# Altium PCB PCB.PcbDoc
Units mil, origin at the board's own origin, x right, y up, seen from the top; angles counter-clockwise.
Board outline 1745 x 3885 mil, 4 copper layers (Top Layer, GND, 3V3, Bottom Layer), stack 23.756 mil thick; 45 components, 36 nets, 184 pads, 198 vias.
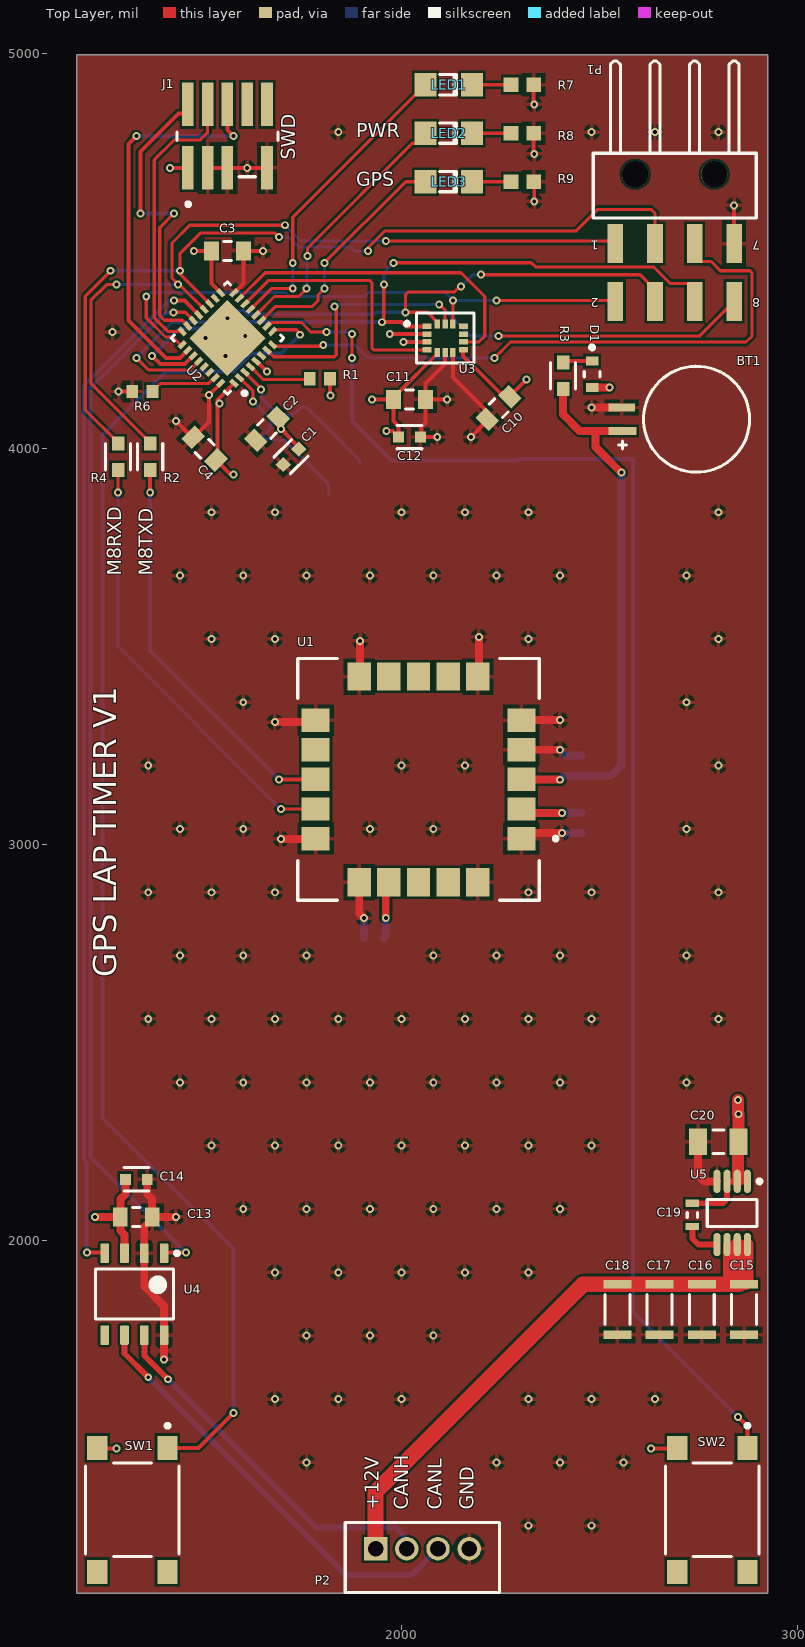
[diagram p0: Top Layer view]
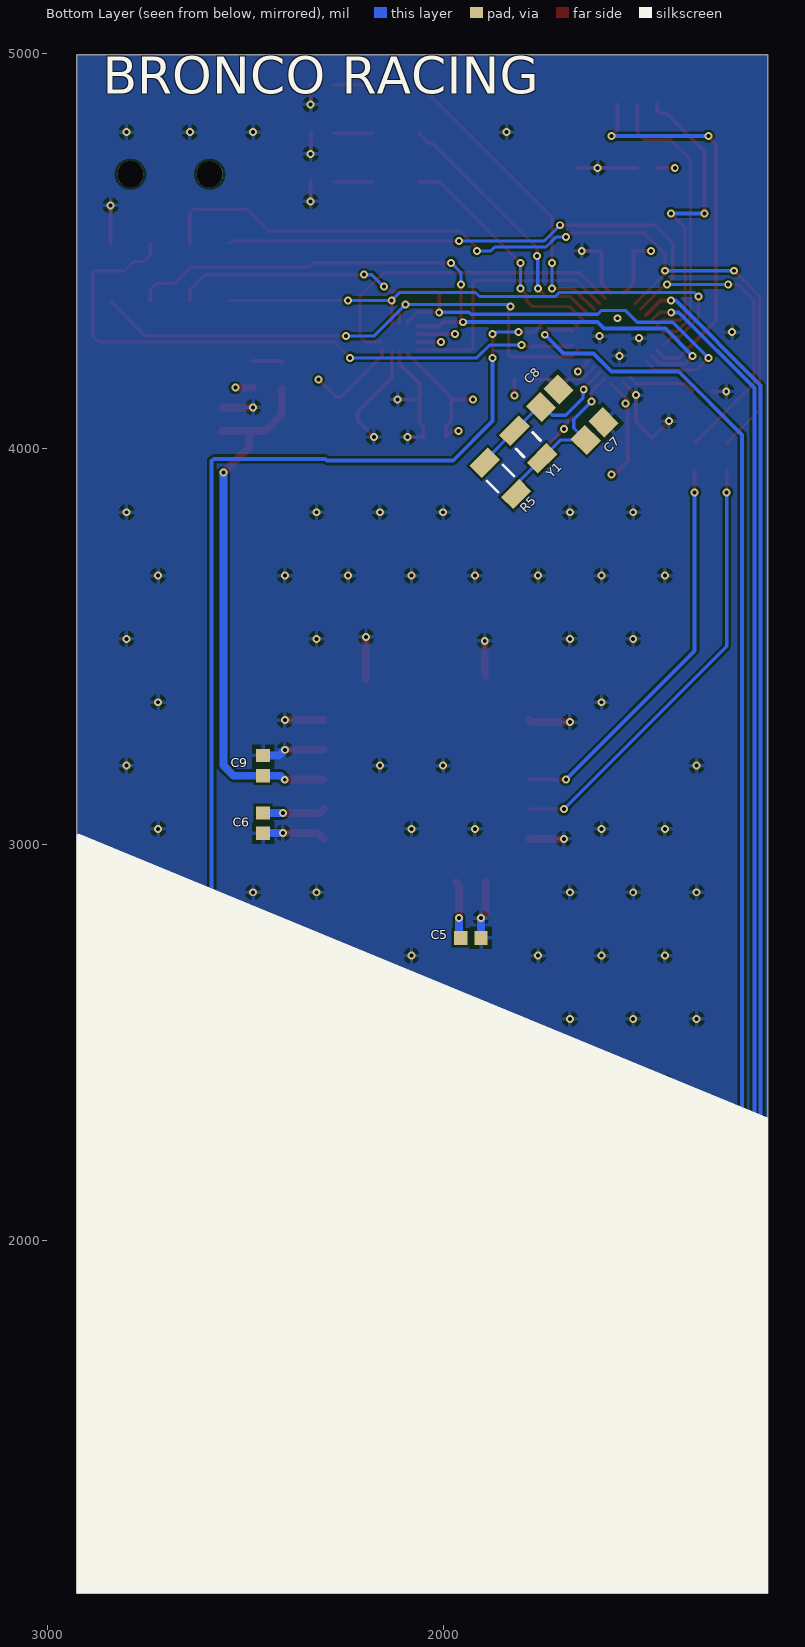
[diagram p1: Bottom Layer view, seen from below]
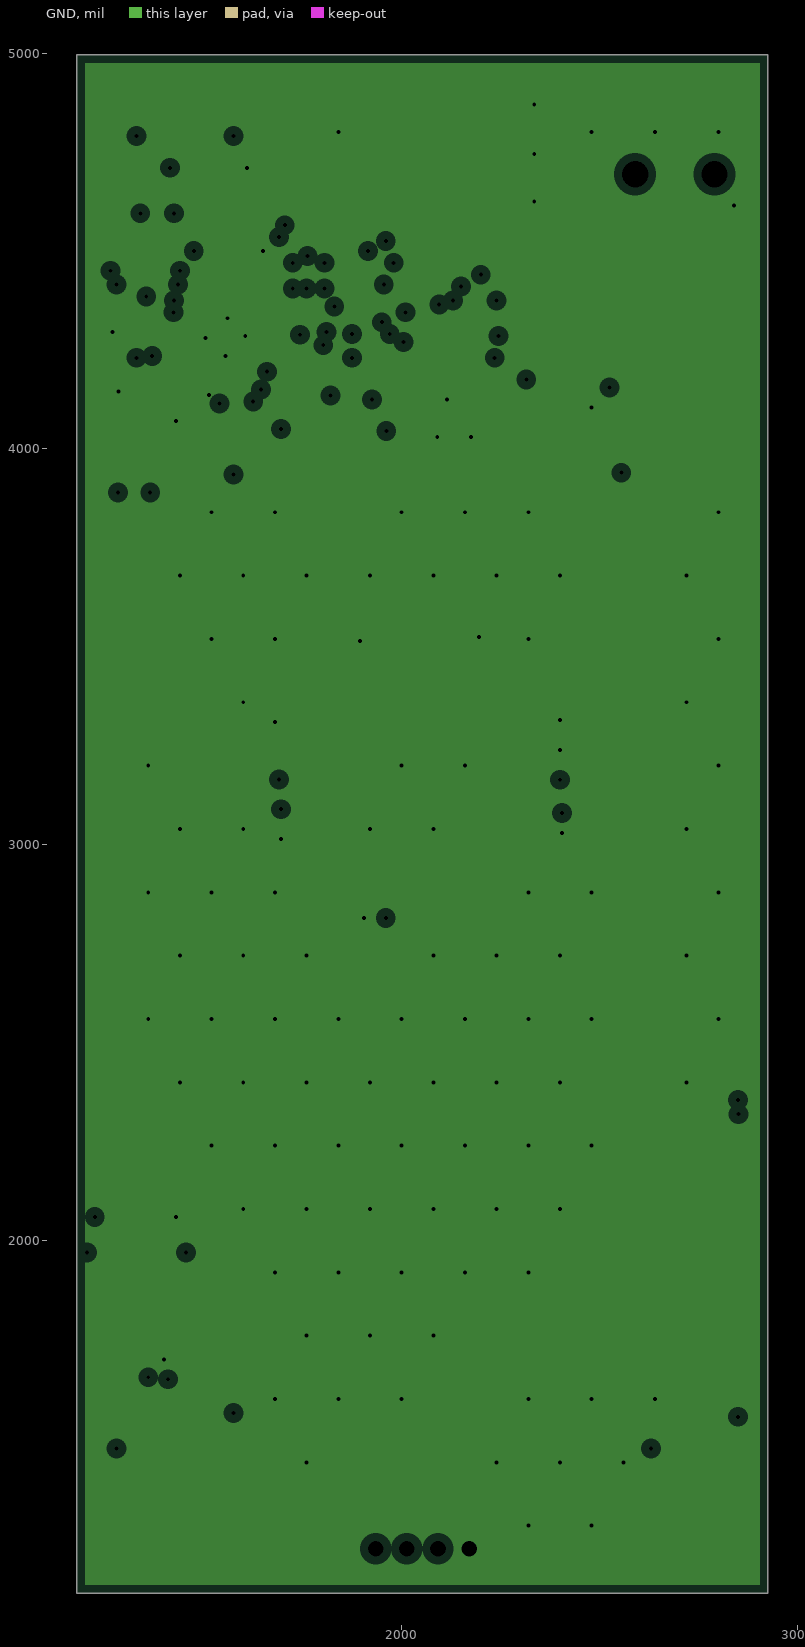
[diagram p2: GND, clearances drawn from the general rule]
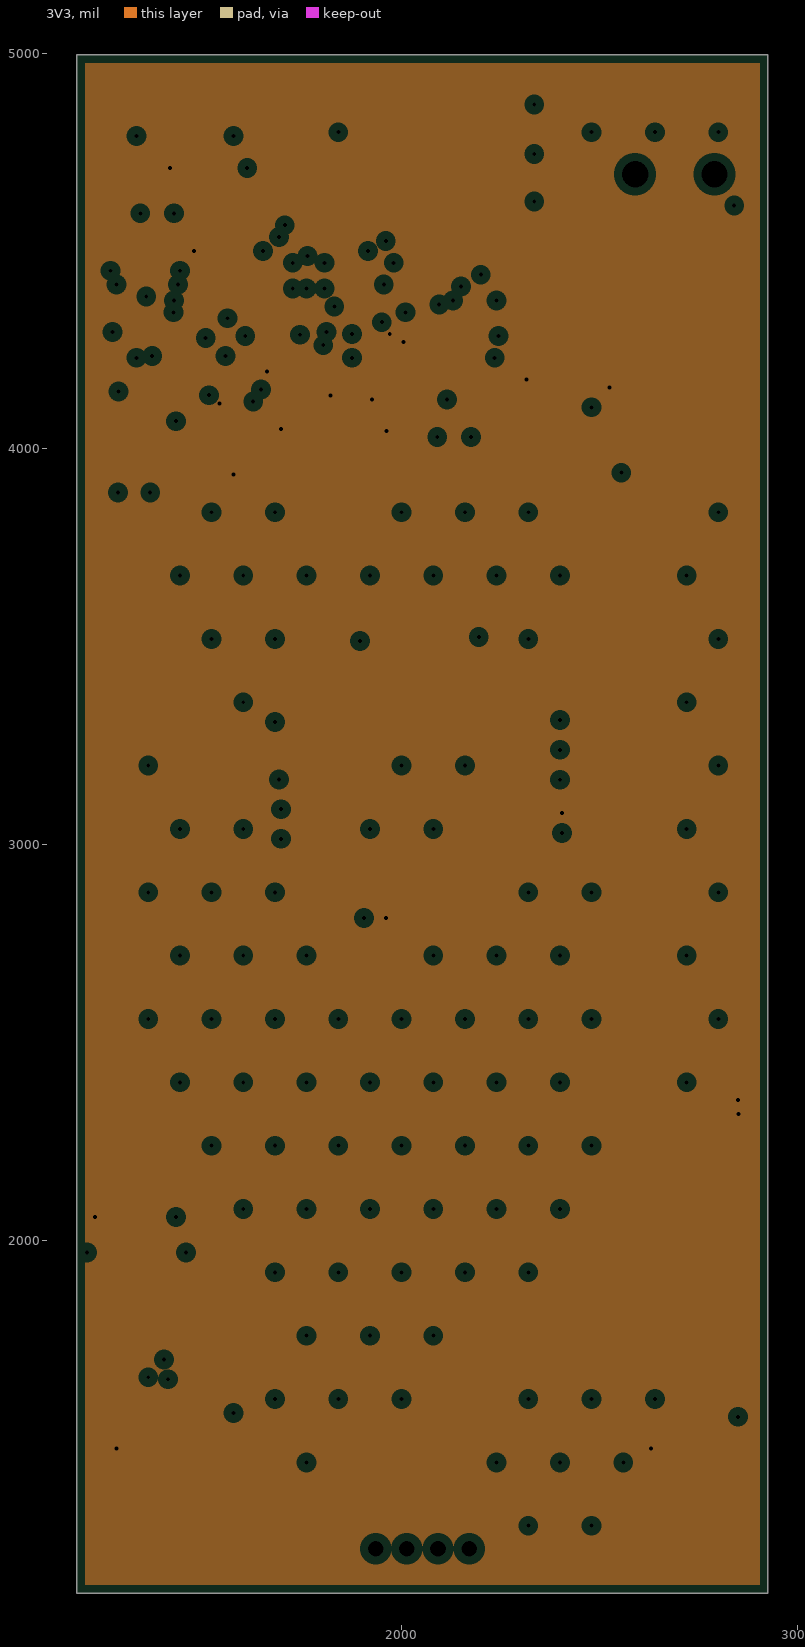
[diagram p3: 3V3, clearances drawn from the general rule]
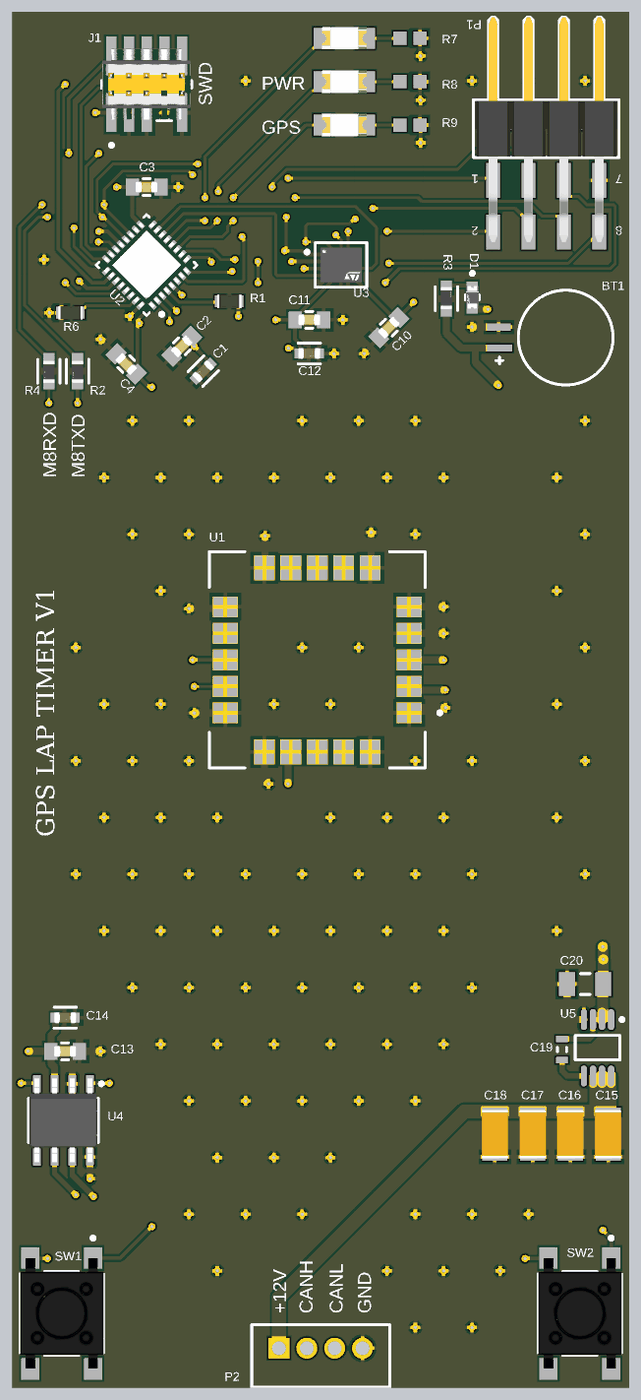
[diagram p4: 3D render of the assembled board from above, using the file's embedded part models]

## Layer stack, top to bottom
Top Solder: solder mask 0.4, Solder Resist, Dk 3.5
Top Layer: signal copper 1.4
Dielectric 2: prepreg 2.8, PP-006, Dk 4.1
GND: plane copper 1.378, net GND
Dielectric 1: dielectric 12.6, FR-4, Dk 4.8
3V3: plane copper 1.378, net 3V3
Dielectric 3: prepreg 2.8, PP-006, Dk 4.1
Bottom Layer: signal copper 1.4
Bottom Solder: solder mask 0.4, Solder Resist, Dk 3.5

## Board outline
1180,1110 2925,1110 2925,4995 1180,4995

## Design rules (kind name [scope] priority, off if disabled: settings)
Clearance "Stitching GND" [IsStitchingVia and InNet('GND') vs (IsVia and (Not IsStitchingVia)) Or IsPad] p1: gap=50 ignorepadtopadclearanceinfootprint=FALSE
Clearance [All] p2: gap=6 ignorepadtopadclearanceinfootprint=TRUE except(0: Arc-Hole Track-Hole SMDPad-Hole THPad-Hole Via-Hole Fill-Hole Poly-Hole Region-Hole Text-Hole)
PlaneClearance [All] p1: clearance=20
PlaneConnect [All] p1: planeconnectstyle=Relief reliefexpansion=20 reliefentries=4 reliefconductorwidth=10 reliefairgap=10
PolygonConnect [All] p1: connectstyle=Relief reliefconductorwidth=10 reliefentries=4 polygonreliefangle="90 Angle" airgapwidth=10
RoutingVias [All] p1: holewidth=10 width=20 viastyle="Through Hole" minholewidth=10 minwidth=20 maxholewidth=28 maxwidth=50
SolderMaskExpansion [All] p1: expansion=4 istentingtop=FALSE
Width [All] p1: maxlimit=50 minlimit=6 preferedwidth=8 minimp=50.000000 maximp=50.000000 favimp=50.000000
28 further rules are at their usual default settings.

## Classes and differential pairs
component class Schematic: BT1 C1 C2 C3 C4 C5 C6 C7 C8 C9 C12 C13 C15 C16 C17 C18 D1 J1 LED1 LED2 LED3 P1 P2 R1 R2 R3 R4 R5 R6 R7 R8 R9 SW1 SW2 U1 U2 U3 U4 U5 Y1

## Components (designator, comment, footprint, x,y, rotation, side; value= is the part's Value field where it differs from the comment)
BT1 "Backup Battery" SEIK-MS621FE-FL11E-2_V 2745,4075 r180 top
C1 "10uF" FP-C1608-080-MFG 1720.51,3980 r225 top
C2 "100nF" FP-CGA3E-0_3-0_1-IPC_A 1660,4050.48 r225 top
C3 "100nF" FP-CGA3E-0_3-0_1-IPC_A 1560,4500 r0 top
C4 "100nF" FP-CGA3E-0_3-0_1-IPC_A 1502.48,4000.48 r135 top
C5 "1uF" CAPC1608X90X35LL15T15 1930,2765 r0 bottom
C6 "1uF" CAPC1608X90X35LL15T15 2455,3055 r90 bottom
C7 "08051A200JAT2A" CAPC2013X140X50NL20T25 1617.7,4045 r315 bottom
C8 "08051A200JAT2A" CAPC2013X140X50NL20T25 1730.82,4128.04 r315 bottom
C9 "1uF" CAPC1608X90X35LL15T15 2455,3200 r270 bottom
C10 "100nF" FP-CGA3E-0_3-0_1-IPC_A 2245,4103.15 r225 top
C11 "100nF" FP-CGA3E-0_3-0_1-IPC_A 2020,4125 r0 top
C12 "10uF" FP-C1608-080-MFG 2020,4030 r0 top
C13 "100nF" FP-CGA3E-0_3-0_1-IPC_A 1329.65,2060 r0 top
C14 "10uF" FP-C1608-080-MFG 1330,2155 r0 top
C15 "CGA5L3X5R1H106K160AB" CAPC3216X190X20LL20 2865,1826.02 r270 top
C16 "CGA5L3X5R1H106K160AB" CAPC3216X190X20LL20 2758.33,1826.02 r270 top
C17 "CGA5L3X5R1H106K160AB" CAPC3216X190X20LL20 2651.67,1826.02 r270 top
C18 "CGA5L3X5R1H106K160AB" CAPC3216X190X20LL20 2545,1826.02 r270 top
C19 "CGA3E2X7R1H104K080AA" CAPC1608X90X20LL10 2734.44,2065 r270 top
C20 "GRM31MR71H105KA88L" CAPC3216X125X55LL15T25 2800,2250 r180 top
D1 "SD0603S040S0R2" FP-SD0603-MFG 2480.99,4188.46 r270 top
J1 "FTSH-105-01-L-DV-007-K" FP-FTSH-105-01-L-DV-007-K-MFG 1560,4790 r0 top
LED1 "150120RS75000" 1206_A 2119.06,4920 r180 top
LED2 "150120GS75000" 1206_A 2119.06,4797.5 r180 top
LED3 "150120BS75000" 1206_A 2119.06,4675 r180 top
P1 "610108249121" 610108249121 2690,4665 r180 top
P2 "B4B-PH-K-S(LF)(SN)" JST-B4B-PH-K-S_V 2052.5,1200 r0 top
R1 "10k" RESC1609X55X30LL15T15 1793.74,4177.13 r180 top
R2 "10" FP-RT0603-MFG 1365,3980 r270 top value=10Ω
R3 "3.3k" FP-RT0603-MFG 2407.7,4185 r90 top value=3.3KΩ
R4 "10" FP-RT0603-MFG 1283.84,3980 r270 top value=10Ω
R5 "ERJ-8ENF1004V" RESC3216X70X50NL05T20 1855.33,3925.34 r45 bottom
R6 "10k" RESC1609X55X30LL15T15 1345.05,4145 r180 top
R7 "200" RESC1609X55X30NL10T20 2305,4920 r180 top
R8 "200" RESC1609X55X30NL10T20 2305,4797.5 r180 top
R9 "200" RESC1609X55X30NL10T20 2305,4675 r180 top
SW1 "PTS645SM43SMTR92LFS" FP-PTS645SM43SMTR92LFS-MFG 1320,1320 r270 top
SW2 "PTS645SM43SMTR92LFS" FP-PTS645SM43SMTR92LFS-MFG 2785,1320 r270 top
U1 "SAM-M8Q-0-10" FP-SAM-M8Q-0-10-MFG 2042.66,3165.16 r180 top
U2 "STM32L432KCU6" FP-UFQFPN32-A0B8-MFG 1560,4280 r135 top
U3 "ASM330LHHTR" FP-LGA-14L-DM00249496-MFG 2110,4280 r0 top
U4 "SN65HVD230DR" D0008A_L 1325,1865 r270 top
U5 "ADP3335ARMZ-3.3RL7" ADI-RM-8_L 2835,2070 r270 top
Y1 "ABS07-120-32.768KHZ-T" ABRA-ABS07_A_V 1785,4010.74 r225 bottom

## Footprints (in the part's own frame and the unit in brackets; to place one, negate y for a bottom-side part, rotate by r counter-clockwise, add the part's x,y. Pads: shape width x height; smd on the part's side, far side on the other; paste and mask are expansions set on the pad)
1206_A [mm] "Chip LED, 2-Leads, Body 3.2x1.6mm, IPC Medium Density"
  rect 1.4x1.5 smd: 1(-1.5,0) 2(1.5,0)
  silkscreen extent -0.5,-0.67 0.6,0.65, body extent -1.6,-0.8 1.6,0.8, height 0.68
610108249121 [mm] "Pin Header, pitch 2.54 mm, SMD, Angled, dual row, 8p"
  rect 1x2.5 smd: 1(3.81,3.72) 2(3.81,7.42) 3(1.27,3.72) 4(1.27,7.42) 5(-1.27,3.72) 6(-1.27,7.42) 7(-3.81,3.72) 8(-3.81,7.42)
  round 1.68 hole 1.68 unplated: MH1(2.54,-0.73) MH2(-2.54,-0.73)
  silkscreen extent -5.23,-8 5.23,2.07, body extent -5.08,-8 5.08,8.16, height 5.1
ABRA-ABS07_A_V [mm] "SMD, 2-Leads, Body 3.2x1.5mm"
  rect 1x1.8 smd: 1(-1.25,0) 2(1.25,0)
  silkscreen extent -0.35,-0.75 0.35,0.75, body extent -1.6,-0.75 1.6,0.75, height 0.9
ADI-RM-8_L [mm] "SOP, 8-Leads, Body 3x3mm, Pitch 0.65mm, IPC High Density"
  oval 1.5x0.45 smd: 1(-2.025,0.975) 2(-2.025,0.325) 3(-2.025,-0.325) 4(-2.025,-0.975) 5(2.025,-0.975) 6(2.025,-0.325) 7(2.025,0.325) 8(2.025,0.975)
  silkscreen extent -2.15,-1.6 0.87,1.88, body extent -1.6,-1.6 1.6,1.6, height 1.1
CAPC1608X90X20LL10 [mm] "Chip Capacitor, 2-Leads, Body 1.70x0.90mm, IPC High Density"
  rect 0.45x0.85 smd: 1(-0.75,0) 2(0.75,0)
  silkscreen extent -0.15,-0.33 0.15,0.33, body extent -0.85,-0.45 0.85,0.45, height 0.9
CAPC1608X90X35LL15T15 [mm] "Chip Capacitor, 2-Leads, Body 1.60x0.81mm, IPC High Density"
  rect 0.85x0.9 smd: 1(-0.65,0) 2(0.65,0)
  body extent -0.88,-0.48 0.87,0.48, height 0.9
CAPC2013X140X50NL20T25 [mm] "Chip Capacitor, 2-Leads, Body 2.00x1.25mm, IPC Medium Density"
  rect 1.3x1.45 smd: 1(-0.8,0) 2(0.8,0)
  body extent -1.1,-0.72 1.1,0.72, height 1.4
CAPC3216X125X55LL15T25 [mm] "Chip Capacitor, 2-Leads, Body 3.20x1.60mm, IPC High Density"
  rect 1.15x1.7 smd: 1(-1.3,0) 2(1.3,0)
  silkscreen extent -0.35,-0.75 0.35,0.75, body extent -1.68,-0.87 1.68,0.88, height 1.25
CAPC3216X190X20LL20 [mm] "Chip Capacitor, 2-Leads, Body 3.5x1.9mm, IPC High Density"
  rect 0.55x1.8 smd: 1(-1.625,0) 2(1.625,0)
  silkscreen extent -0.95,-0.8 0.95,0.8, body extent -1.75,-0.95 1.75,0.95, height 1.9
D0008A_L [mm] "SOIC, 8-Leads, Body 5x4mm, Pitch 1.27mm, IPC High Density"
  rrect18% 1.25x0.55 smd: 1(-2.625,1.905) 2(-2.625,0.635) 3(-2.625,-0.635) 4(-2.625,-1.905) 5(2.625,-1.905) 6(2.625,-0.635) 7(2.625,0.635) 8(2.625,1.905)
  silkscreen extent -2.75,-2.5 1.6,2.86, body extent -3,-2.45 3,2.45, height 1.63
FP-C1608-080-MFG [mm]
  rect 0.7x0.7 smd paste+0 mask+0: 1(-0.7,0) 2(0.7,0)
  silkscreen extent -0.8,-0.75 0.8,0.75, body extent -1.15,-0.55 1.15,0.55, height 0.25
FP-CGA3E-0_3-0_1-IPC_A [mm]
  rect 0.956x1.206 smd paste+0 mask+0: 1(-1.025,0) 2(1.025,0)
  silkscreen extent -0.25,-0.6 0.25,0.6, body extent -2,-1.1 2,1.1, height 0.25
FP-FTSH-105-01-L-DV-007-K-MFG [mm]
  rect 0.74x2.79 smd paste+0 mask+0: 1(-2.54,-2.035) 2(-2.54,2.035) 3(-1.27,-2.035) 4(-1.27,2.035) 5(0,-2.035) 6(0,2.035) 8(1.27,2.035) 9(2.54,-2.035) 10(2.54,2.035)
  silkscreen extent -3.24,-4.49 3.24,0.27, body extent -3.34,-3.53 3.34,3.53, height 0.25
FP-LGA-14L-DM00249496-MFG [mm]
  rect 0.575x0.35 smd paste-1000 mask+0: 1(-1.162,0.75) 2(-1.162,0.25) 3(-1.162,-0.25) 4(-1.162,-0.75) 8(1.162,-0.75) 9(1.162,-0.25) 10(1.162,0.25) 11(1.162,0.75)
  rect 0.35x0.575 smd paste-1000 mask+0: 5(-0.5,-0.913) 6(0,-0.913) 7(0.5,-0.913) 12(0.5,0.913) 13(0,0.913) 14(-0.5,0.913)
  silkscreen extent -2.57,-1.6 1.85,1.6, body extent -2.05,-1.8 2.05,1.8, height 0.25
FP-PTS645SM43SMTR92LFS-MFG [mm]
  rect 1.55x1.3 smd paste+0 mask+0: 1(-3.975,2.25) 2(3.975,2.25) 3(-3.975,-2.25) 4(3.975,-2.25)
  silkscreen extent -5.52,-3 3,3, body extent -4.85,-3.1 4.85,3.1, height 0.25
FP-RT0603-MFG [mm]
  rect 0.9x0.8 smd paste+0 mask+0: 1(-0.85,0) 2(0.85,0)
  silkscreen extent -0.85,-0.81 0.86,0.8, body extent -1.4,-0.55 1.4,0.55, height 0.25
FP-SAM-M8Q-0-10-MFG [mm]
  rect 1.8x1.5 smd paste-1000 mask+0: 1(-6.6,3.8) 2(-6.6,1.9) 3(-6.6,0) 4(-6.6,-1.9) 5(-6.6,-3.8) 11(6.6,-3.8) 12(6.6,-1.9) 13(6.6,0) 14(6.6,1.9) 15(6.6,3.8)
  rect 1.5x1.8 smd paste-1000 mask+0: 6(-3.8,-6.6) 7(-1.9,-6.6) 8(0,-6.6) 9(1.9,-6.6) 10(3.8,-6.6) 16(3.8,6.6) 17(1.9,6.6) 18(0,6.6) 19(-1.9,6.6) 20(-3.8,6.6)
  silkscreen extent -8.93,-7.75 7.75,7.75
FP-SD0603-MFG [mm]
  rect 0.6x0.8 smd paste+0 mask+0: 1(-0.85,0) 2(0.85,0)
  silkscreen extent -1.85,-0.5 0.18,0.5, body extent -1.25,-0.6 1.25,0.6, height 0.25
FP-UFQFPN32-A0B8-MFG [mm]
  rect 0.6x0.3 smd paste+0 mask+0: 1(-2.35,1.75) 2(-2.35,1.25) 3(-2.35,0.75) 4(-2.35,0.25) 5(-2.35,-0.25) 6(-2.35,-0.75) 7(-2.35,-1.25) 8(-2.35,-1.75) 17(2.35,-1.75) 18(2.35,-1.25) 19(2.35,-0.75) 20(2.35,-0.25) 21(2.35,0.25) 22(2.35,0.75) 23(2.35,1.25) 24(2.35,1.75)
  rect 0.3x0.6 smd paste+0 mask+0: 9(-1.75,-2.35) 10(-1.25,-2.35) 11(-0.75,-2.35) 12(-0.25,-2.35) 13(0.25,-2.35) 14(0.75,-2.35) 15(1.25,-2.35) 16(1.75,-2.35) 25(1.75,2.35) 26(1.25,2.35) 27(0.75,2.35) 28(0.25,2.35) 29(-0.25,2.35) 30(-0.75,2.35) 31(-1.25,2.35) 32(-1.75,2.35)
  rect 3.45x3.45 smd paste+0 mask+0: 33(0,0)
  silkscreen extent -3.4,-2.55 2.55,2.55, body extent -2.75,-2.75 2.75,2.75, height 0.25
JST-B4B-PH-K-S_V [mm] "Connector, 4-Leads, Body 9.9x4.5mm, Pitch 2mm"
  rect 1.5x1.5 hole 1: 1(-3,0.55)
  round 1.5 hole 1: 2(-1,0.55) 3(1,0.55) 4(3,0.55)
  silkscreen extent -4.95,-2.25 4.95,2.25, body extent -4.95,-2.25 4.95,2.25, height 6
RESC1609X55X30LL15T15 [mm] "Chip Resistor, 2-Leads, Body 1.75x0.95mm, IPC High Density"
  rect 0.75x0.85 smd: 1(-0.65,0) 2(0.65,0)
  body extent -0.87,-0.48 0.87,0.48, height 0.55
RESC1609X55X30NL10T20 [mm] "Chip Resistor, 2-Leads, Body 1.60x0.85mm, IPC Medium Density"
  rect 0.95x0.95 smd: 1(-0.725,0) 2(0.725,0)
  body extent -0.85,-0.48 0.85,0.48, height 0.55
RESC3216X70X50NL05T20 [mm] "Chip Resistor, 2-Leads, Body 3.20x1.60mm, IPC Medium Density"
  rect 1.1x1.65 smd: 1(-1.425,0) 2(1.425,0)
  silkscreen extent -0.5,-0.73 0.5,0.73, body extent -1.63,-0.82 1.62,0.82, height 0.7
SEIK-MS621FE-FL11E-2_V [mm] "SMD, 2-Leads, Diameter 6.8mm"
  rect 1.8x0.5 smd: 1(4.75,0.75)
  rect 1.7x0.5 smd: 2(4.8,-0.75)
  silkscreen extent -3.4,-3.4 5,3.4, body extent -3.4,-3.4 4.35,3.4, height 2.7

## Part data
BT1: library part CMP-2000-05342-1, "MS Lihium Rechargeable Battery, 3 V, -20 to 60 degC, Tray", Capacity=5.5mAh, Manufacturer=SeikoInstruments, Output Voltage=3V, Battery Size=621, Brand=SeikoInstrumentsMicroEnergy, Chemistry=Lithium, Datasheet URL=http://datasheet.octopart.com/MS621FE-FL11E-Seiko-datasheet-5320152.pdf, Datasheet Version=Jan-08, Diameter=6.8mm, Factory Pack Quantity=100, Height=2.1mm, Manufacturer URL=http://www.sii.co.jp/en/, Mounting Style=WithLeads, Orientation=Vertical, Packaging=Tray, Product Category=CoinCellBattery, Rechargeable/Non-Rechargeable=Rechargeable, RoHS=NotApplicable, Series=MS, Termination Style=ThroughHole, Type=CoinCellBatterywithLeads, Unit Weight=0.008113oz
C1 C12 C14: library part CMP-2000-04979-2, "CAP CER 10UF 10V X5R 0603", Manufacturer=TDK, Manufacturer Part Number=C1608X5R1A106K080AC, Package=C1608-080, Temperature="-55°C to +85°C", Temperature Characteristic=X5R, Temperature Coefficient=15%, Temperature Range High=+85°C, Temperature Range Low=-55°C, Tolerance=10%, Voltage=10V, Automotive=No, Capacitance=10uF, Category=Cap, ComponentLink2Description=Datasheet, ComponentLink2URL=https://product.tdk.com/info/en/documents/chara_sheet/C1608X5R1A106K080AC.pdf, Device Class L1="Passive Components", Device Class L2=Capacitors, Device Class L3="Ceramic Capacitors", Digikey Description="CAP CER 10UF 10V X5R 0603", Footprint Url=https://product.tdk.com/info/en/catalog/spec/mlccspec_commercial_general_midvoltage_en.pdf, Height=0.9mm, Ipc Land Pattern Name=CAPC16080X80, Lead Free=Yes, Material=Ceramic, Mouser Description="CAP CER 10UF 10V X5R 0603", Octopart=https://octopart.com/c1608x5r1a106k080ac-tdk-26013468, RoHS=TRUE, Voltage Rating=10V
C2 C3 C4 C10 C11 C13: library part CMP-2000-07546-2, "Cap Ceramic 100nF 50V X7R 10% Pad SMD 0603 +125°C Automotive T/R", Case Code (Imperial)=0603, Case Code (Metric)=1608, Dielectric=X7R, Max Operating Temperature=125°C, Min Operating Temperature=-55°C, Package Quantity=1, Ratings=AEC-Q200, Tolerance=10%, Voltage=50V, Capacitance=100nF, Case/Package=0603, Composition=Ceramic, Depth=0.8mm, Height=0.8mm, Lead Free="Lead Free", Length=1.6mm, Mount="Surface Mount", Packaging="Tape and Reel", Radiation Hardening=No, REACH SVHC="No SVHC", Termination=SMD/SMT, Thickness=0.035inch, Voltage Rating=50V, Voltage Rating (DC)=50V, Weight=7.1E-05oz, Width=0.8mm
C5 C6 C9: library part CMP-2006-02216-2, Manufacturer=Kemet, Part Number=C0603C105K3PAC7867
C7 C8: library part CMP-2007-04537-1, Manufacturer="AVX Interconnect / Elco", Part Number=08051A200JAT2A
C15 C16 C17 C18: library part CMP-2000-07597-1, "Chip Capacitor, 10 uF, +/- 10%, 50 V, -55 to 85 degC, 1206 (3216 Metric), RoHS, Tape and Reel", Capacitance=10uF, Case Code (Imperial)=1206, Case Code (Metric)=3216, Dielectric=X5R, Manufacturer=TDK, Max Operating Temperature=85degC, Min Operating Temperature=-55degC, Package Description="2-Pin Surface Mount Device, Body 3.2 x 1.6 mm", Package Quantity=1, Tolerance=10%, Voltage Rating=50V, Case/Package=1206, Composition=Ceramic, Datasheet URL=https://product.tdk.com/info/en/documents/chara_sheet/CGA5L3X5R1H106K160AB.pdf, Datasheet Version=01/2016, Depth=1.6mm, Height=1.6mm, Lead Free=LeadFree, Length=3.2mm, Manufacturer URL=http://www.tdk.com/, Mount=SurfaceMount, Mounting Technology=SurfaceMount, Package Reference=1206, Packaging=TapeandReel, Radiation Hardening=No, REACH SVHC=NoSVHC, RoHSCompliant=True, Termination=SMD/SMT, Thickness=0.063inch, Voltage Rating (DC)=50V, Weight=0.000571oz, Width=1.6mm
C19: library part CMP-2000-07546-1, "Chip Capacitor, 0.1 uF, +/- 10%, 50 V, -55 to 125 degC, 0603 (1608 Metric), RoHS, Tape and Reel", Capacitance=100nF, Case Code (Imperial)=0603, Case Code (Metric)=1608, Dielectric=X7R, Manufacturer=TDK, Max Operating Temperature=125degC, Min Operating Temperature=-55degC, Package Description="2-Pin Surface Mount Device, Body 1.6 x 0.8 mm", Package Quantity=1, Package Reference=603, Tolerance=10%, Voltage=50V, Case/Package=0603, Composition=Ceramic, Datasheet URL=https://product.tdk.com/info/en/catalog/datasheets/mlcc_automotive_general_en.pdf, Datasheet Version=12/2014, Depth=0.8mm, Height=0.8mm, Lead Free=LeadFree, Length=1.6mm, Manufacturer URL=http://www.tdk.com/, Mount=SurfaceMount, Mounting Technology=SurfaceMount, Packaging=TapeandReel, Radiation Hardening=No, REACH SVHC=NoSVHC, RoHSCompliant=True, Termination=SMD/SMT, Thickness=0.035inch, Voltage Rating=50V, Voltage Rating (DC)=50V, Weight=7.1E-05oz, Width=0.8mm
C20: library part CMP-2000-06356-1, "Chip Capacitor, 1 uF, +/- 10%, 50 V, -55 to 125 degC, 1206 (3216 Metric), RoHS, Tape and Reel", Capacitance=1uF, Case Code - in=1206, Case Code - mm=3216, Case Height=1.15mm, Case Length=3.2mm, Case Width=1.6mm, Dielectric=X7R, Manufacturer=Murata, Maximum Operating Temperature=+125C, Minimum Operating Temperature=-55C, Package / Case=1206(3216metric), Package Description="2-Pin Surface Mount Device, Body 3.2 x 1.6 mm", Tolerance=10%, Voltage Rating DC=50V, Brand=MurataElectronics, Datasheet URL=http://search.murata.co.jp/Ceramy/image/img/A01X/G101/ENG/GRM31MR71H105KA88-01.pdf, Datasheet Version=03/2016, Factory Pack Quantity=3000, Manufacturer URL=http://www.murata.com/, Mounting Technology=SurfaceMount, Package Reference=1206, Packaging=Reel, Product=GeneralTypeMLCCs, Product Category=MultilayerCeramicCapacitorsMLCC-SMD/SMT, RoHS=Details, Series=GRM, Termination Style=SMD/SMT, Type=GeneralPurposeMLCC
D1: library part CMP-04549-000001-1, "DIODE SCHOTTKY 40V 200MA 0603", Forward Current=0.2A, Manufacturer=AVX, Max Repetitive Reverse Voltage=40V, Max Surge Forward Current=2A, Package=SD0603, Temperature="-55°C to +125°C", Temperature Range High=+125°C, Temperature Range Low=-55°C, Automotive=No, Category=Diode, ComponentLink2Description=Datasheet, ComponentLink2URL=http://datasheets.avx.com/schottky.pdf, Device Class L1="Discrete Semiconductors", Device Class L2=Diodes, Device Class L3="Schottky Diodes", Digikey Description="DIODE SCHOTTKY 40V 200MA 0603", Height=0.86mm, Lead Free=Yes, Manufacturer Part Number=SD0603S040S0R2, Mouser Description="Schottky Diodes & Rectifiers 40volts 0.2A SIZE 0603", Octopart=https://octopart.com/sd0603s040s0r2-avx-24931763, Reverse Voltage=40V, RoHS=TRUE
J1: library part CMP-02766-000093-1, "CONN HEADER SMD 10POS 1.27MM", Current Rating=3.4A, Manufacturer=Samtec, Package=0, Temperature="-55°C to +125°C", Temperature Range High=+125°C, Temperature Range Low=-55°C, Automotive=No, Category=Conn, ComponentLink2Description=Datasheet, ComponentLink2URL=http://suddendocs.samtec.com/catalog_english/ftsh_smt.pdf, Conn Gender=Male, Conn Orientation=Vertical, Contact Material=Gold,Nickel, Device Class L1=Connectors, Device Class L2="Headers and Wire Housings", Device Class L3=unset, Digikey Description="CONN HEADER SMD 10POS 1.27MM", Footprint Url=http://suddendocs.samtec.com/prints/ftsh-1xx-xx-xxx-dv-xxx-footprint.pdf, Height=6.38mm, Lead Free=Yes, Manufacturer Part Number=FTSH-105-01-L-DV-007-K, Mouser Description="Conn Unshrouded Header HDR 10 POS 1.27mm Solder ST SMD Tube", Number Of Contacts=9, Number Of Rows=2, Octopart=https://octopart.com/ftsh-105-01-l-dv-007-k-samtec-53647300, Pitch=1.27mm, RoHS=TRUE, Standoff Height=0.2mm
LED1: library part CMP-1426-00013-1, "SMD mono-color Chip LED, WL-SMCW, Red", Color=Red, Manufacturer="Wuerth Elektronik", ComponentLink1Description="Manufacturer URL", ComponentLink1URL=http://www.we-online.com, ComponentLink2Description=Datasheet, ComponentLink2URL=http://katalog.we-online.com/led/datasheet/150120RS75000.pdf, PackageReference=1206_A, PartNumber=150120RS75000
LED2: library part CMP-1426-00014-1, "SMD mono-color Chip LED, WL-SMCW, Green", Color=Green, Manufacturer="Wuerth Elektronik", ComponentLink1Description="Manufacturer URL", ComponentLink1URL=http://www.we-online.com, ComponentLink2Description=Datasheet, ComponentLink2URL=http://katalog.we-online.com/led/datasheet/150120GS75000.pdf, PackageReference=1206_A, PartNumber=150120GS75000
LED3: library part CMP-1426-00015-1, "SMD mono-color Chip LED, WL-SMCW, Blue", Color=Blue, Manufacturer="Wuerth Elektronik", ComponentLink1Description="Manufacturer URL", ComponentLink1URL=http://www.we-online.com, ComponentLink2Description=Datasheet, ComponentLink2URL=http://katalog.we-online.com/led/datasheet/150120BS75000.pdf, PackageReference=1206_A, PartNumber=150120BS75000
P1: library part CMP-1502-01147-1, "SMT Angled Pin Header WR-PHD, Pitch 2.54 mm, Dual Row, 8 pins", Contact Resistance=20mOhm, Manufacturer="Wurth Elektronik", Operating Temperature=-40to105degC, Rated Current=3A, Withstanding Voltage=600VAC, Working Voltage=250VAC, Datasheet URL=https://katalog.we-online.de/em/datasheet/6101xx249121.pdf, Gender=Male, Manufacturer URL=http://www.we-online.de, Mounting Technology=SMT, Orientation=Angled, Package Reference=610108249121, Packaging=TapeandReel, Part Number=610108249121, Pin Number=8, Pitch=2.54mm, Publisher=WurthElektronik, Row Number=Dual
P2: library part CMP-2000-05165-1, "Male Header, Pitch 2 mm, 1 x 4 Position, Height 6 mm, Tail Length 3.4 mm, -25 to 85 degC, RoHS, Bulk", Manufacturer=JST, Datasheet URL=http://datasheet.octopart.com/B4B-PH-K-S%28LF%29%28SN%29-JST-datasheet-10558886.pdf, Datasheet Version=Apr-09, Manufacturer URL=http://www.jst.com/home2.html, No of Positions=4, Pitch=2mm, Style/Orientation=StraightHeader/Plug, Termination=Crimp, Type=ShroudedHeader
R1 R6: library part CMP-2000-07452-1, "Chip Resistor, 10 KOhm, +/- 1%, 0.1 W, -55 to 155 degC, 0603 (1608 Metric), RoHS, Tape and Reel", Case Code (Imperial)=0603, Case Code (Metric)=1608, Manufacturer=Panasonic, Max Operating Temperature=155degC, Max Power Dissipation=100mW, Min Operating Temperature=-55degC, Package Description="2-Pin Surface Mount Device, Body 1.6 x 0.85 mm", Package Quantity=1, Package Reference=603, Resistance=10KOhm, Temperature Coefficient=100ppm\/degreesC, Tolerance=1%, Voltage Rating=75V, Case\/Package=0603, Composition=ThickFilm, Contact Plating=Tin, Datasheet URL=https://industrial.panasonic.com/cdbs/www-data/pdf/RDA0000/AOA0000C304.pdf, Datasheet Version=02/2017, Depth=0.8mm, Height=0.45mm, Lead Free=LeadFree, Length=1.6mm, Manufacturer URL=http://www.panasonic.com/, Military Standard=Not, Mount=SurfaceMount, Mounting Technology=SurfaceMount, Number of Pins=2, Number of Terminations=2, Packaging=TapeandReel, Power Rating=100mW, Radiation Hardening=No, REACH SVHC=NoSVHC, RoHSCompliant=true, Termination=SMD/SMT, Voltage Rating (DC)=75V, Width=0.031inch
R2 R4: library part CMP-2000-04347-2, "RES SMD 10 OHM 0.1% 1/10W 0603", Manufacturer=Yageo, Manufacturer Part Number=RT0603BRD0710RL, Package=RT0603, Power Rating=0.1W, Resistance=10Ω, Temperature="-55°C to +155°C", Temperature Coefficient="25 ppm/°C", Temperature Range High=+155°C, Temperature Range Low=-55°C, Tolerance=0.001, Voltage Rating=75V, Automotive=No, Category=Res, ComponentLink2Description=Datasheet, ComponentLink2URL=http://www.yageo.com/documents/recent/PYu-RT_1-to-0.01_RoHS_L_9.pdf, Composition="Thin Film", Device Class L1="Passive Components", Device Class L2=Resistors, Device Class L3="Chip SMD Resistors", Digikey Description="RES SMD 10 OHM 0.1% 1/10W 0603", Footprint Url=http://www.yageo.com/exep/pages/download/literatures/PYu-R_Mount_10.pdf, Height=0.55mm, Ipc Land Pattern Name=RESC16080X45, Lead Free=Yes, Mouser Description="Thin Film Resistors - SMD 1/10W 10 ohm .1% 25ppm", Octopart=https://octopart.com/rt0603brd0710rl-yageo-1216748, RoHS=TRUE, Series=RT
R3: library part CMP-03412-033968-1, "RES 3.30K OHM 1/10W 1% SMD 0603", Manufacturer=Yageo, Manufacturer Part Number=RT0603FRE073K3L, Package=RT0603, Power Rating=0.1W, Resistance=3.3KΩ, Temperature="-55°C to +155°C", Temperature Coefficient="50 ppm/°C", Temperature Range High=+155°C, Temperature Range Low=-55°C, Tolerance=0.01, Voltage Rating=75V, Automotive=No, Category=Res, ComponentLink2Description=Datasheet, ComponentLink2URL=http://www.yageo.com/documents/recent/PYu-RT_1-to-0.01_RoHS_L_9.pdf, Composition="Thin Film", Device Class L1="Passive Components", Device Class L2=Resistors, Device Class L3="Chip SMD Resistors", Digikey Description="RES 3.30K OHM 1/10W 1% SMD 0603", Footprint Url=http://www.yageo.com/exep/pages/download/literatures/PYu-R_Mount_10.pdf, Height=0.55mm, Ipc Land Pattern Name=RESC16080X45, Lead Free=Yes, Mouser Description="High Precision-High Stability Chip Resistor Thin Film 0603 3.3kOhm 1% Paper T/R", Octopart=https://octopart.com/rt0603fre073k3l-yageo-39814754, RoHS=TRUE, Series=RT
R5: library part CMP-2003-00020-1, Manufacturer=Panasonic, Part Number=ERJ-8ENF1004V
R7 R8 R9: library part CMP-2000-03727-1, Manufacturer="Vishay Dale", Part Number=TNPW0603200RBEEA
SW1 SW2: library part CMP-2000-05160-2, "SWITCH TACTILE SPST-NO 0.05A 12V", Case/Package=SMD/SMT, Color=Black, Contact Resistance=100mR, Current Rating=50mA, Max Operating Temperature=60°C, Max Voltage Rating (DC)=12V, Min Operating Temperature=-20°C, Operating Force=160gf, Package Quantity=1, Actuator Length=0.85mm, Actuator Material=Nylon, Actuator Type=Standard, Contact Material=Silver, Contact Plating=Silver, Depth=9mm, Illumination Type=Non-Illuminated, Lead Free="Lead Free", Length=6mm, Max Current Rating=50mA, Mechanical Life=100000Cycles, Mount="Surface Mount", Orientation=Straight, Packaging="Tape and Reel", REACH SVHC="No SVHC", Switch Function=Off-Mom, Termination="Gull Wing", Throw Configuration=SPST, Voltage Rating (DC)=12V
U1: library part CMP-207130-000004-3, "RF RX GALILEO 1.575GHZ/1.602GHZ", Manufacturer=uBlox, Max Frequency=1602MHz, Max Supply Voltage=3.6V, Min Supply Voltage=2.7V, Nominal Supply Current=9.5-32mA, Package=0, Temperature="-40°C to +85°C", Temperature Range High=+85°C, Temperature Range Low=-40°C, Automotive=Yes, Automotive Grade="Grade 3", Category=IC, ComponentLink2Description=Datasheet, ComponentLink2URL=https://www.u-blox.com/sites/default/files/SAM-M8Q_DataSheet_%28UBX-16012619%29.pdf, Data Rate=400kbits/s, Device Class L1="Integrated Circuits (ICs)", Device Class L2="RF Semiconductors and Devices", Device Class L3=Transceivers, Digikey Description="RF RX GALILEO 1.575GHZ/1.602GHZ", Footprint Url=https://www.u-blox.com/sites/default/files/SAM-M8Q_HardwareIntegrationManual_%28UBX-16018358%29.pdf, Height=6.8mm, Interface=I2C,UART,Other, Lead Free=Yes, Manufacturer Part Number=SAM-M8Q-0-10, Octopart=https://octopart.com/sam-m8q-0-10-u-blox-88247750, RoHS=TRUE, Sensitivity=-165dBm
U2: library part CMP-12105-000033-1, "IC MCU 32BIT 256KB FLASH 32QFPN", Ambient Temperature Range High=+85°C, Ambient Temperature Range Low=-40°C, Frequency=80MHz, Manufacturer=STMicroelectronics, Max Junction Temp=+105°C, Max Supply Voltage=3.6V, Min Supply Voltage=1.62V, Package=UFQFPN32-A0B8, Temperature="-40°C to +105°C", Automotive=No, Category=IC, ComponentLink2Description=Datasheet, ComponentLink2URL=https://www.st.com/content/ccc/resource/technical/document/datasheet/24/01/9f/59/f0/83/47/fc/DM00257205.pdf/files/DM00257205.pdf/jcr:content/translations/en.DM00257205.pdf, Core Architecture="ARM Cortex-M4", Data Bus Width=32bits, Device Class L1="Integrated Circuits (ICs)", Device Class L2="Embedded Processors and Controllers", Device Class L3=Microcontrollers, Digikey Description="IC MCU 32BIT 256KB FLASH 32QFPN", Height=0.6mm, Interface=I2C,SPI,UART,USART,CAN,USB,LIN,IrDA,Other, Lead Free=Yes, Manufacturer Part Number=STM32L432KCU6, Memory Size=256KBytes, Memory Type=FLASH, Number Of A/D Converters=1, Number Of Adc Channels=11, Number Of Cores=1, Number Of I2C Channels=2, Number Of I/Os=26, Number Of Pwm Channels=1, Number Of Spi Channels=2, Number Of Timers/Counters=11, Number Of Uart Channels=3, Number Of Usb Channels=1, Octopart=https://octopart.com/stm32l432kcu6-stmicroelectronics-71093510, Ram Size=64KBytes, RoHS=TRUE, Temperature Range High=+105°C, Temperature Range Low=-40°C
U3: library part CMP-12177-000004-1, "AUTOMOTIVE 6-AXIS INERTIAL MODUL", Manufacturer=STMicroelectronics, Max Supply Voltage=3.6V, Min Supply Voltage=1.62V, Operating Supply Current=360-1300uA, Package=LGA-14L-DM00249496, Temperature="-40°C to +105°C", Temperature Range High=+105°C, Temperature Range Low=-40°C, Accel Range=2/4/8/16g, Automotive=Yes, Automotive Grade="Grade 2", Category=IC, ComponentLink2Description=Datasheet, ComponentLink2URL=https://www.st.com/resource/en/datasheet/asm330lhh.pdf, Device Class L1=Sensors, Device Class L2="Motion Sensors", Device Class L3="Inertial Measurement Units (IMUs)", Digikey Description="AUTOMOTIVE 6-AXIS INERTIAL MODUL", Footprint Url=https://www.st.com/content/ccc/resource/technical/document/technical_note/73/17/9c/16/dd/96/4a/01/CD00134799.pdf/files/CD00134799.pdf/jcr:content/translations/en.CD00134799.pdf, Gyro Range=125/250/500/1000/2000/4000°/s, Height=0.86mm, Lead Free=Yes, Manufacturer Part Number=ASM330LHHTR, Mouser Description="Automotive 6-Axis Inertial Module 3D Accelerometer and 3D Gyroscope 14-Pin LGA T/R", Octopart=https://octopart.com/asm330lhhtr-stmicroelectronics-93180171, Resolution=16bits, RoHS=TRUE, Sensor Output=I2C,SPI, Sensor Type=Temperature,Accelerometer,Gyroscope
U4: library part CMP-0315-00015-2, "3.3V CAN Transceiver with Standby Mode, 17 mA, -40 to 85 degC, 8-pin SOIC (D), Green (RoHS & no Sb/Br)", Drivers Per Package=1, Low Power Mode=Standby, Manufacturer="Texas Instruments", Rating=Catalog, Supply Voltage(s)(V)=3.3, Code_JEDEC=MS-012AA, ComponentLink1Description=Datasheet, ComponentLink1URL=http://www.ti.com/general/docs/lit/getliterature.tsp?genericPartNumber=SN65HVD230&fileType=pdf, DatasheetVersion=SLOS346K, Eco-Plan="Green (RoHS & no Sb/Br)", ICC(Max)(mA)=17, Isolated=No, Mounting Technology="Surface Mount", PackageDescription="8-Pin Plastic Small Outline Integrated Circuit, 4.9 x 3.9 mm, Pitch 1.27 mm Pitch", PackageReference=D0008A, PackageVersion="revM, Jun-2011", PartNumber=SN65HVD230DR, Receivers Per Package=1, SubFamily=CAN, Transient Pulse Protection(V)="-25 to 25"
U5: library part CMP-0786-00245-1, "High Accuracy, Ultralow IQ, 500 mA, anyCAP Low Dropout Regulator, 2.6 to 12 V Vin, 3.3 V Vout, Industrial, 8-pin SOP (RM-8), Reel", Manufacturer="Analog Devices", Code_JEDEC=MO-187-AA, ComponentLink1Description="Manufacturer URL", ComponentLink1URL=http://www.analog.com/en/index.html, ComponentLink2Description=Datasheet, ComponentLink2URL=http://www.analog.com/static/imported-files/data_sheets/ADP3335.pdf, ComponentLink3Description="Package Specification", ComponentLink3URL=http://www.analog.com/static/imported-files/packages/PKG_PDF/MSOP%28RM%29/RM_8.pdf, ComponentLink4Description="URL Link1", ComponentLink4URL="Product URL:http://www.analog.com/en/ADP3335/productSearch.html", DatasheetVersion="Rev. C", Mounting Technology="Surface Mount", PackageDescription="8-Pin Mini Small Outline Package, Body 3 x 3 mm, Pitch 0.65 mm", PackageReference=RM-8, PackageVersion=Aug-05, Packing=Reel, PartNumber=ADP3335ARMZ-3.3RL7, Vin (max) (V)=12, Vin (min) (V)=2.6
Y1: library part CMP-2000-07587-1, "Tuning Fork Crystal, 32.768 KHz, +/- 20 ppm, -40 to 85 degC, 2-Pin SMD, RoHS, Tape and Reel", Case\/Package=SMD/SMT, ESR (Equivalent Series Resistance)=55KOhm, Frequency=32.768KHz, Frequency Tolerance=20ppm, Load Capacitance=6pF, Manufacturer=Abracon, Max Operating Temperature=85degC, Min Operating Temperature=-40degC, Package Description="2-Pin Surface Mount Device, Body 3.2 x 1.5 mm", Package Quantity=3000, Package Reference=ABS07, Series Resistance=60KOhm, Datasheet URL=http://www.abracon.com/Resonators/ABS07-120-32.768kHz-T.pdf, Datasheet Version=11/2014, Depth=1.5mm, Height=0.035inch, Lead Free=LeadFree, Length=3.2mm, Manufacturer URL=http://www.abracon.com/, Mount=SurfaceMount, Mounting Technology=SurfaceMount, Number of Pins=2, Packaging=TapeandReel, Radiation Hardening=No, REACH SVHC=NoSVHC, RoHSCompliant=True, Termination=SMD/SMT, Tolerance=20ppm, Width=0.061inch

## Via types
v1: diameter 20, hole 10, Top Layer to Bottom Layer, 198 vias

## Nets (pads, with @x,y where several pads share a name; then routed paths per layer and width w, separated by ;. In a path a pad name is that pad's centre, name@x,y a point inside that pad or via, vN(x,y) a via of type N, cw(c..) or ccw(c..) an arc to the next point about the centre after c; other vN are vias at no path point)
3V3: C1.1 C2.1 C3.1 C4.1 C5.2 C6.2 C10.1 C11.1 C12.1 C13.1 C14.1 C19.1 C20.1 D1.2 J1.1 R1.1 SW1.3 SW2.3 U1.2 U1.17 U2.1 U2.5 U2.17 U3.2 U3.3 U3.5 U3.8 U4.3 U5.1 U5.2 U5.3 | length 2539.5
  Top Layer w10: SW1.3 1232.91,1475 v1(1280,1475) ; v1(1415,4710) 1415.12,4709.88 J1.1 ; v1(1475,4500) C3.1 1519.65,4417.79 U2.17 ; v1(1575,3935) 1573.09,3936.91 1566.05,3936.91 C4.1 1534.5,3975.42 1534.5,4123.66 U2.1 U2.1@1577.98,4165.86 ; U2.5 1632.92,4221.54 1659.46,4195 v1(1660,4195) ; C2.1@1674,4079.01 1695,4058.02 v1(1695,4050) 1695,4053 1705,4043 1705,4040 1740,4005 C1.1 ; R1.1 1819.67,4176.8 1819.67,4135.33 v1(1820,4135) ; v1(1925,4125) C11.1 ; v1(1961.24,4045.07) 1977.37,4045.07 C12.1 1992.44,4057.56 1979.65,4070.35 C11.1 ; v1(1970,4290) 2064.07,4290 U3.2 ; v1(2005,4270) 2064.07,4270 U3.3 ; U3.5 2090.32,4239.65 2088.43,4237.76 2087.48,4237.76 1993.47,4143.74 1979.65,4129.92 C11.1 ; U3.8 2155,4249.7 2155,4235 2185,4205 2258.32,4131.68 C10.1 2273.53,4133.53 v1(2315,4175) ; v1(2630,1475) 2694.92,1475 SW2.3
  Top Layer w15: C19.1 2811.21,2094.53 2821.68,2105 2821.68,2149.2 U5.3 U5.2 U5.1
  Top Layer w20: v1(1225,2060) C13.1 ; U4.3 1300,2015 1290,2025 1290,2105 1302.44,2117.44 C14.1 ; v1(1960,2815) 1960,2897.46 U1.17 ; U1.2 2312.85,3080 v1(2405,3080) ; D1.2 v1(2525,4155)
  Top Layer w30: U5.2 2849.49,2151.42 2849.49,2248.31 C20.1 v1(2851.18,2319.41) 2850,2320.59 v1(2850,2355)
  Bottom Layer w20: C5.2 1960,2769.41 v1(1960,2815) ; v1(2405,3080) 2454.41,3080 C6.2
  other v1: 1540,4115
+12: C15.1 C16.1 C17.1 C18.1 P2.1 U5.6 U5.7 U5.8 | length 1601.6
  Top Layer w20: 2822.2,1892.8 U5.6
  Top Layer w30: 2822.2,1892.8 2825,1890 ; C15.1@2847.8,1894.17 2851.97,1890 C15.1 2869.21,1890 2873.39,1894.17 U5.8
  Top Layer w35: C15.1@2847.8,1894.17 U5.7
  Top Layer w40: P2.1 1934.39,1365.96 2458.43,1890 C18.1 C17.1 C16.1 2825,1890 C15.1@2851.97,1890
BUTTON1: SW1.1 U2.9 | length 3490.2
  Top Layer w8: U2.9 1678.32,4300.88 1734.12,4300.88 v1@1745,4290
  Top Layer w10: SW1.1 1486.5,1476.5 v1(1575,1565)
  Bottom Layer w10: v1(1575,1565) 1575,1980 1245,2310 1245,4035 1405,4195 1575,4195 1620.72,4240.72 1695.72,4240.72 v1(1743.36,4288.36)
BUTTON2: SW2.1 U2.10 | length 3818.2
  Top Layer w8: U2.10 1662.91,4310.62 1671.52,4319.23 1747.02,4319.23 1771.25,4295 v1(1810,4295) ; v1(1875,4230) v1(1875,4290)
  Top Layer w10: v1(2850,1555) 2873.58,1531.42 SW2.1
  Bottom Layer w8: v1(1810,4295) 1866.75,4295 1871.75,4290 v1(1875,4290)
  Bottom Layer w10: v1(1875,4230) 1875,4070 1974.61,3970.39 2293.85,3970.39 2298.46,3975 2579.14,3975 2585,3969.14 2585,1820 v1(2850,1555)
CANH: P2.2 U4.7 | length 932.5
  Top Layer w15: U4.7 1350,1710 v1(1410,1650)
  Bottom Layer w15: v1(1410,1650) 1785,1275 1986.21,1275 2004.7,1256.51 2004.7,1230.08 P2.2
CANL: P2.3 U4.6 | length 1098.1
  Top Layer w15: U4.6 1300,1715 v1(1360,1655)
  Bottom Layer w15: v1(1360,1655) 1860,1155 2025.22,1155 P2.3
CANRXD: U2.21 U4.4 | length 2632.8
  Top Layer w10: v1(1205,1970) 1248.35,1970 U4.4 ; v1(1425,4375) 1451.08,4375 U2.21
  Bottom Layer w10: v1(1205,1970) 1204,1971 1204,2198.37 1198,2204.37 1198,4160.63 1412.37,4375 v1(1425,4375)
CANTXD: U2.22 U4.1 | length 2686.8
  Top Layer w8: v1(1424,4345) 1453.24,4345 U2.22
  Top Layer w10: U4.1 1401.65,1970 v1(1455,1970)
  Bottom Layer w10: v1(1424,4345) 1405,4345 1214,4154 1214,2211 v1(1455,1970)
GND: BT1.2 C1.2 C2.2 C3.2 C4.2 C5.1 C6.1 C7.1 C8.1 C9.1 C10.2 C11.2 C12.2 C13.2 C14.2 C15.2 C16.2 C17.2 C18.2 C20.2 J1.3 J1.5 J1.9 P1.7 P2.4 R6.2 R7.1 R8.1 R9.1 U1.1 U1.4 U1.5 U1.6 U1.10 U1.11 U1.15 U1.16 U1.20 U2.16 U2.32 U2.33 U3.6 U3.7 U4.2 U4.8 U5.4 | length 3145.1
  Top Layer w10: v1(1285,4145) R6.2 ; v1(1430,4070) 1470.99,4029.01 C4.2 1513.16,4068.22 v1(1513.16,4135.73) U2.32 ; J1.3 J1.5 v1(1610,4709.88) J1.9 ; U2.16 1600.35,4417.79 C3.2 v1(1650,4500) ; v1(2090,4030) C12.2 2050,4032.44 2050,4055 2060.35,4065.35 C11.2 ; U3.6 2110,4215 2060.35,4165.35 C11.2 ; v1(2115,4125) C11.2 ; U3.7 2129.68,4180.31 2216.47,4093.53 2216.47,4071.47 v1(2175,4030) ; R9.1 2335,4673.54 v1(2335,4625) ; R8.1 2333.54,4746.46 v1(2335,4745) ; R7.1 2333.54,4871.46 v1(2335,4870) ; P1.7 v1(2840,4615)
  Top Layer w20: C14.2 1357.56,2117.44 1370,2105 C13.2 ; v1(1400,1700) U4.8 1400,1835 1350,1885 U4.2 1350,2035.08 1370,2055.08 C13.2 ; v1(1430,2060) C13.2 ; v1(1680,3310) 1778.05,3310 U1.11 ; v1(1695,3015) 1782.26,3015 U1.15 ; U1.16 1893.05,2826.95 v1(1905,2815) ; U1.10 1895,3426.95 v1(1895,3515) ; U1.6@2195,3418.91 v1(2195,3525) ; U1.1 2316.95,3030 v1(2405,3030) ; U1.4 v1(2400.04,3239.96) ; U1.5 2302.74,3315 v1(2400,3315) ; v1(2480,4105) 2480.47,4104.53 BT1.2 ; C20.2 2748.82,2166.18 2765.28,2149.72 U5.4
  Bottom Layer w20: C5.1 1905,2765.59 v1(1905,2815) ; v1(2400.04,3239.96) 2414.41,3225.59 C9.1 ; v1(2405,3030) 2405.59,3029.41 C6.1
  other v1: 2320,1280 2480,1280 1760,1440 2240,1440 2400,1440 2560,1440 1680,1600 1840,1600 2000,1600 2320,1600 2480,1600 2640,1600 1760,1760 1920,1760 2080,1760 1680,1920 1840,1920 2000,1920 2160,1920 2320,1920 1600,2080 1760,2080 1920,2080 2080,2080 2240,2080 2400,2080 1520,2240 1680,2240 1840,2240 2000,2240 2160,2240 2320,2240 2480,2240 1440,2400 1600,2400 1760,2400 1920,2400 2080,2400 2240,2400 2400,2400 2720,2400 1360,2560 1520,2560 1680,2560 1840,2560 2000,2560 2160,2560 2320,2560 2480,2560 2800,2560 1440,2720 1600,2720 1760,2720 2080,2720 2240,2720 2400,2720 2720,2720 1360,2880 1520,2880 1680,2880 2320,2880 2480,2880 2800,2880 1440,3040 1600,3040 1920,3040 2080,3040 2720,3040 1360,3200 2000,3200 2160,3200 2800,3200 1600,3360 2720,3360 1520,3520 1680,3520 2320,3520 2800,3520 1440,3680 1600,3680 1760,3680 1920,3680 2080,3680 2240,3680 2400,3680 2720,3680 1520,3840 1680,3840 2000,3840 2160,3840 2320,3840 2800,3840 1555,4235 1505,4280 1605,4285 1270,4295 1560,4330 1840,4800 2480,4800 2640,4800 2800,4800
IMU_INT1: U2.14 U3.4 | length 653.7
  Top Layer w8: U2.14 1663.24,4425 1920.31,4425 1925,4420.31 1925,4254.69 1929.69,4250 2063.76,4250 U3.4
IMU_INT2: U2.15 U3.9 | length 831.4
  Top Layer w8: U2.15 1655.4,4445 2150,4445 2210,4385 2210,4285 2195.16,4270.16 U3.9
LED_B: LED3.2 U2.11 | length 605.7
  Top Layer w8: U2.11 1681.76,4360 1775,4360 1788.85,4373.85 1788.85,4388.85 v1(1805,4405) ; v1(1805,4470) 2010,4675 LED3.2
  Bottom Layer w8: v1(1805,4405) v1(1805,4470)
LED_G: LED2.2 U2.12 | length 677.3
  Top Layer w8: U2.12 1678.92,4385 1740,4385 v1(1760,4405) ; v1(1762.5,4487.5) 1762.5,4507.5 2027.22,4772.22 2036.44,4772.22 2060,4795.78 LED2.2
  Bottom Layer w8: v1(1760,4405) 1761.25,4406.25 1761.25,4486.25 v1(1762.5,4487.5)
LED_R: LED1.2 U2.13 | length 783.2
  Top Layer w8: U2.13 1671.08,4405 v1(1725,4405) ; v1(1725,4470) 1725,4585 2034.47,4894.47 2036.44,4894.47 2060,4918.03 LED1.2
  Bottom Layer w8: v1(1725,4405) v1(1725,4470)
M8RXD: P1.3 R4.1 U2.19 | length 2199.6
  Top Layer w8: v1(1265,4450) 1201,4386 1201,4098.27 1283.84,4015.43 R4.1 ; U2.19 1442.3,4439.46 1442.3,4447.7 v1(1440,4450) 1440,4493.28 1491.72,4545 1680,4545 v1(1690,4535) ; v1(1915,4500) 1915,4508.28 1956.72,4550 2440,4550 2495,4605 2630,4605 2640,4595 P1.3
  Bottom Layer w8: v1(1265,4450) v1(1440,4450) ; v1(1690,4535) 1715.2,4535 1740.2,4510 1870,4510 1880,4500 v1(1915,4500)
M8TXD: P1.1 R2.1 U2.20 | length 2022.4
  Top Layer w8: v1(1280,4415) 1255,4415 1215,4375 1215,4165.43 1365,4015.43 R2.1 ; U2.20 1440,4413.92 1440,4415 v1(1435,4415) 1435,4416.11 1420,4431.11 1420,4520 1465,4565 v1(1705,4565) ; v1(1960,4525) 2533.54,4525 P1.1
  Bottom Layer w8: v1(1280,4415) v1(1435,4415) ; v1(1705,4565) 1745,4525 v1(1960,4525)
NetC7_2: C7.2 R5.1 U2.2 Y1.2 | length 451.1
  Top Layer w8: U2.2 1625,4145.4 v1(1625,4120)
  Bottom Layer w8: v1(1625,4120) 1670,4075 1670,4052.76 C7.2 1642.06,4024.82 1672.59,4024.82 1674.68,4022.73 1703.41,4022.73 Y1.2 1815.66,3910.48 R5.1
NetC8_2: C8.2 R5.2 U2.3 Y1.1 | length 419.1
  Top Layer w8: U2.3 1604.54,4192.08 1645,4151.62 v1(1645,4150)
  Bottom Layer w8: v1(1645,4150) 1647,4148 1647,4128 1690,4085 1725,4085 1745.77,4105.77 C8.2 1759.57,4105.77 Y1.1 1895,3970.34 R5.2
NetC19_2: C19.2 U5.5 | length 98.4
  Top Layer w15: C19.2 2734.44,2005.56 2749.72,1990.28 U5.5
NetD1_1: D1.1 R3.2 | length 74.7
  Top Layer w10: R3.2 2411.16,4221.93 D1.1
NetLED1_1: LED1.1 R7.2 | length 98.3
  Top Layer w8: LED1.1 R7.2
NetLED2_1: LED2.1 R8.2 | length 98.3
  Top Layer w8: LED2.1 R8.2
NetLED3_1: LED3.1 R9.2 | length 98.3
  Top Layer w8: LED3.1 R9.2
NetR1_2: R1.2 U2.4 | length 164.1
  Top Layer w8: U2.4 1651.08,4175 1766.02,4175 R1.2
NetR2_2: R2.2 U1.13 | length 1009
  Top Layer w10: v1(1365,3890) R2.2 ; v1(1690,3165) 1782.66,3165 U1.13
  Bottom Layer w10: v1(1365,3890) 1365,3490 v1(1690,3165)
NetR4_2: R4.2 U1.14 | length 1114.8
  Top Layer w8: v1(1283.84,3890) R4.2 ; v1(1695,3090) 1782.46,3090 U1.14
  Bottom Layer w8: v1(1283.84,3890) 1283.84,3501.16 v1(1695,3090)
NetR6_1: R6.1 U2.31 | length 174.3
  Top Layer w8: R6.1 1370.64,4146.97 1381.4,4157.73 1383.37,4157.73 1390.64,4165 1511.9,4165 1526.68,4179.78 U2.31
SPICLK: P1.8 U2.7 U3.13 | length 1445
  Top Layer w8: U2.7 1676.75,4232.85 1830.31,4232.85 1835,4237.54 1835,4351.75 1830,4356.75 v1(1830,4360) ; v1(2095,4365) 2110,4350 U3.13 ; v1(2245,4285) 2752.13,4285 P1.8
  Bottom Layer w8: v1(1830,4360) 1835,4365 v1(2095,4365) 2175,4285 v1(2245,4285)
SPICS: P1.2 U2.25 U3.12 | length 1439.1
  Top Layer w8: v1(1355,4385) 1355,4331.42 1403.71,4282.7 1422.3,4282.7 1442.43,4262.57 1445.13,4262.57 U2.25 ; U3.12 2129.84,4316.08 2129.84,4374.84 v1(2130,4375) ; v1(2240,4375) 2537.87,4375 P1.2
  Bottom Layer w8: v1(1355,4385) 1355.69,4385 1365.69,4395 1706.72,4395 1716.72,4385 1908.36,4385 1918.36,4395 2110,4395 v1(2130,4375) v1(2240,4375)
SPIMISO: P1.6 U2.27 U3.1 | length 1836
  Top Layer w8: v1(1950,4320) 1950,4323.25 1955,4328.25 v1(1955,4415) ; v1(1980,4470) 2327.82,4470 2338.49,4459.33 2636.58,4459.33 2677.83,4418.09 2724.31,4418.09 2740,4402.4 P1.6
  Top Layer w10: v1(1370,4235) 1391,4214 1452.24,4214 U2.27 ; v1(1950,4320) 2000.07,4320 2010.55,4309.53 U3.1 2064.53,4309.53 U3.1@2065,4310
  Bottom Layer w8: v1(1955,4415) 1955,4445 v1(1980,4470)
  Bottom Layer w10: v1(1370,4235) 1438.94,4303.94 1594.25,4303.94 1610.3,4320 v1(1950,4320)
SPIMOSI: P1.4 U2.28 U3.14 | length 1751.5
  Top Layer w8: v1(1330,4230) 1361,4199 1465.08,4199 U2.28 ; U3.14 2090.32,4320.35 2065.67,4345 v1(2010,4345) 2010,4390 2016.39,4396.39 2133.14,4396.39 2146.75,4410 v1(2150,4410) ; v1(2200,4440) 2602.4,4440 2640,4402.4 P1.4
  Bottom Layer w8: v1(1330,4230) 1420,4320 1510,4320 1540,4350 1600,4350 1610,4340 1930,4340 1935,4345 v1(2010,4345) ; v1(2150,4410) 2180,4440 v1(2200,4440)
SWCLK: J1.4 U2.24 | length 718.1
  Top Layer w8: U2.24 1409.51,4296.7 1375,4331.21 1375,4730 1425,4780 1490,4780 1510,4800 J1.4
SWDIO: J1.2 U2.23 | length 772.7
  Top Layer w8: v1(1425,4595) 1389,4559 1389,4337.01 1401.01,4325 1445.4,4325 U2.23
  Top Layer w10: v1(1340,4595) 1340,4750.67 1436.29,4846.96 1450.43,4846.96 1460,4856.52 J1.2
  Bottom Layer w10: v1(1340,4595) v1(1425,4595)
SWO: J1.6 U2.26 | length 1001.3
  Top Layer w10: v1(1330,4790) 1310.53,4770.53 1310.53,4324.47 1405,4230 1440.4,4230 U2.26 ; J1.6 1560,4805 v1(1575,4790)
  Bottom Layer w10: v1(1330,4790) v1(1575,4790)
TEST_PIN: P1.5 U2.8 | length 1602.6
  Top Layer w8: U2.8 1678.32,4259.12 1795.87,4259.12 1798.81,4262.06 v1(1802.06,4262.06) ; v1(2235,4230) 2275,4270 2870,4270 2885,4285 2885,4445 2880,4450 2805,4450 2781.67,4473.33 2755.69,4473.33 2740,4489.02 P1.5
  Bottom Layer w8: v1(1802.06,4262.06) 1882.94,4262.06 1915,4230 v1(2235,4230)
V_BCKUP: BT1.1 C9.2 R3.1 U1.3 | length 1371.9
  Top Layer w20: U1.3 2399.37,3165.16 v1(2400.22,3164.31) ; R3.1 2407.7,4087.3 2449.53,4045.47 2490,4045.47 ; v1(2555,3940) 2490,4005 2490,4045.47 ; BT1.1 2490,4045.47
  Bottom Layer w20: v1(2400.22,3164.31) 2410.33,3174.41 C9.2 2529.41,3174.41 2555,3200 v1(2555,3940)
pads on no net: J1.8 J1.10 P1.MH1 P1.MH2 SW1.2 SW1.4 SW2.2 SW2.4 U1.7 U1.8 U1.9 U1.12 U1.18 U1.19 U2.6 U2.18 U2.29 U2.30 U3.10 U3.11 U4.5

## Polygon pours and split planes (outlines as drawn)
GND on Bottom Layer "GND_L04_P003" (solid, remove dead copper, pour order 3): 1180,1110 2925,1110 2925,4995 1180,4995
GND on Top Layer "GND_L01_P000" (solid, remove dead copper, pour order 0): 1180,1110 2925,1110 2925,4995 1180,4995
no net on Bottom Overlay "NONET_L04_P-001" (solid): 1180,1110 2925,1110 2925,3030 1180,2310
GND on GND (split plane): 2904.9,1130.1 1200.1,1130.1 1200.1,4974.9 2904.9,4974.9
3V3 on 3V3 (split plane): 2904.9,1130.1 1200.1,1130.1 1200.1,4974.9 2904.9,4974.9

## Silkscreen, mask and mechanical layers (free items; w line width, h text height)
Top Overlay:
  text "PWR" at 1885,4775 h60
  text "SWD" at 1744.36,4730 h60 r90
  text "GPS" at 1885,4650.64 h60
  text "M8RXD" at 1304.36,3680 h60 r90
  text "M8TXD" at 1384.36,3680 h60 r90
  text "GPS LAP TIMER V1" at 1298.98,2665 h100 r90
  text "+12V" at 1955,1320 h60 r90
  text "CANH" at 2029.36,1320 h60 r90
  text "CANL" at 2114.36,1320 h60 r90
  text "GND" at 2194.36,1320 h60 r90
Bottom Overlay:
  text "BRONCO RACING" at 2860,4865.96 h160
Mechanical 1:
  lines w2: 1180,1180 ccw(c1250,1180) 1250,1110 2855,1110 ccw(c2855,1180) 2925,1180 2925,4925 ccw(c2855,4925) 2855,4995 1250,4995 ccw(c1250,4925) 1180,4925 1180,1180
Top Assembly:
  text "KEEP OUT" at 1760,3681.6 h150
  text "KEEP OUT" at 1361.6,3520 h150 r270
  text "KEEP OUT" at 2783.4,2845 h150 r90
  text "KEEP OUT" at 1675,2426.6 h150

## Text inside footprints (layer, text, board x,y; h text height)
P1: Top Overlay "7" at 2905.35,4535.08 h40 r180; Top Overlay "8" at 2905.35,4389.41 h40 r180; Top Overlay "1" at 2498.27,4535.08 h40 r180; Top Overlay "2" at 2498.27,4389.41 h40 r180